# EAGLE board RemoconCar (EAGLE 5.10)
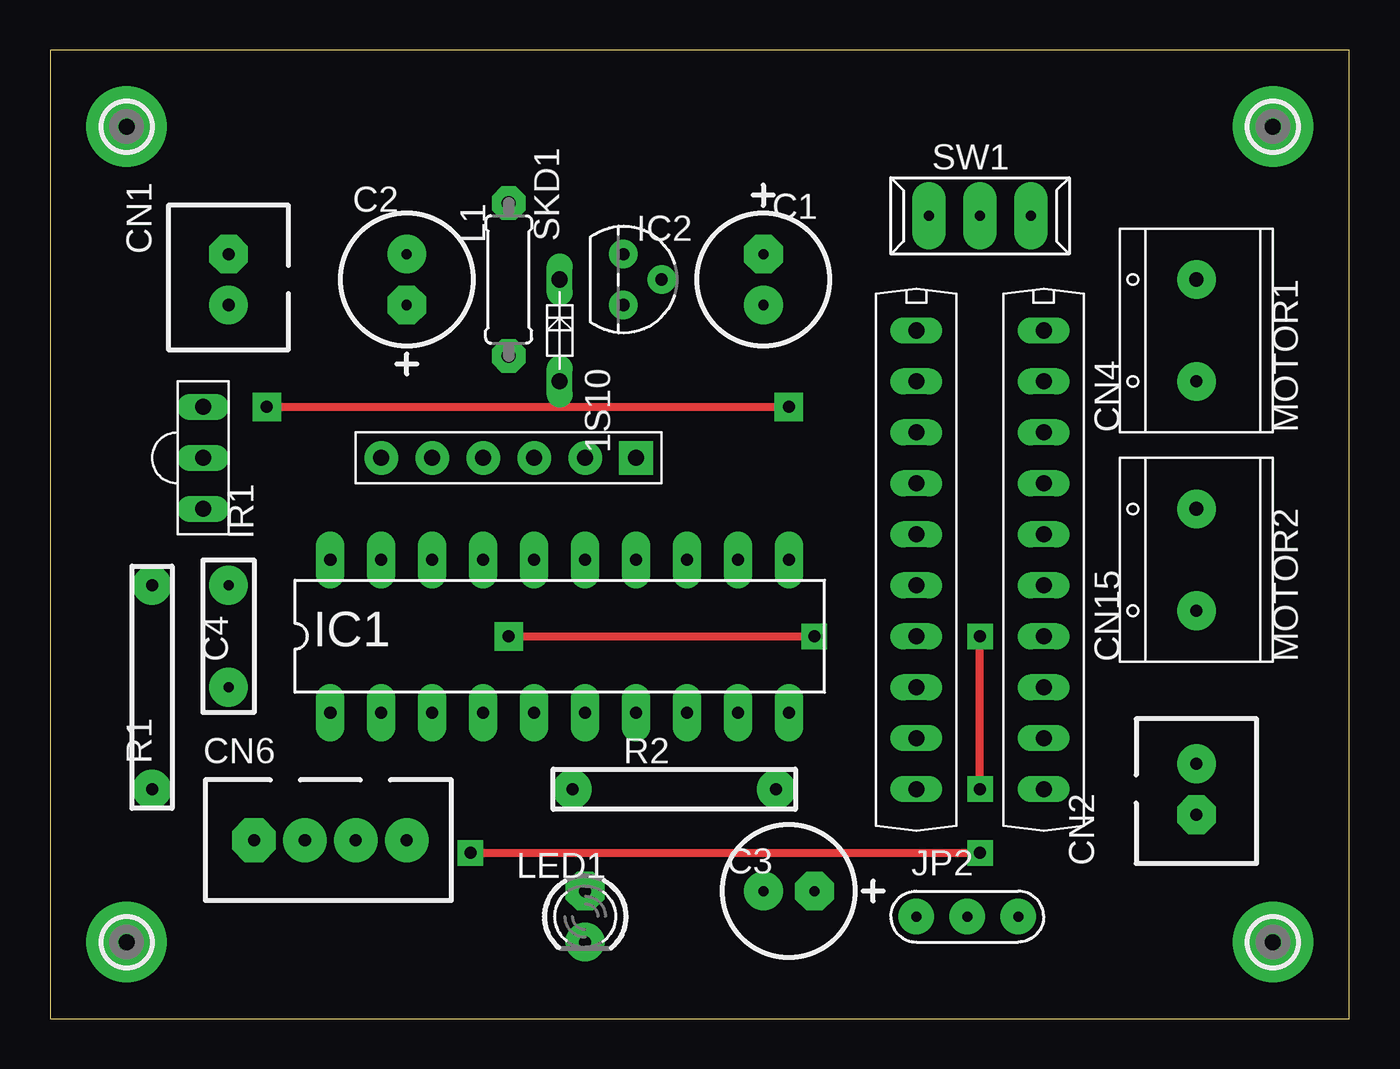
[diagram p0: board, top side]
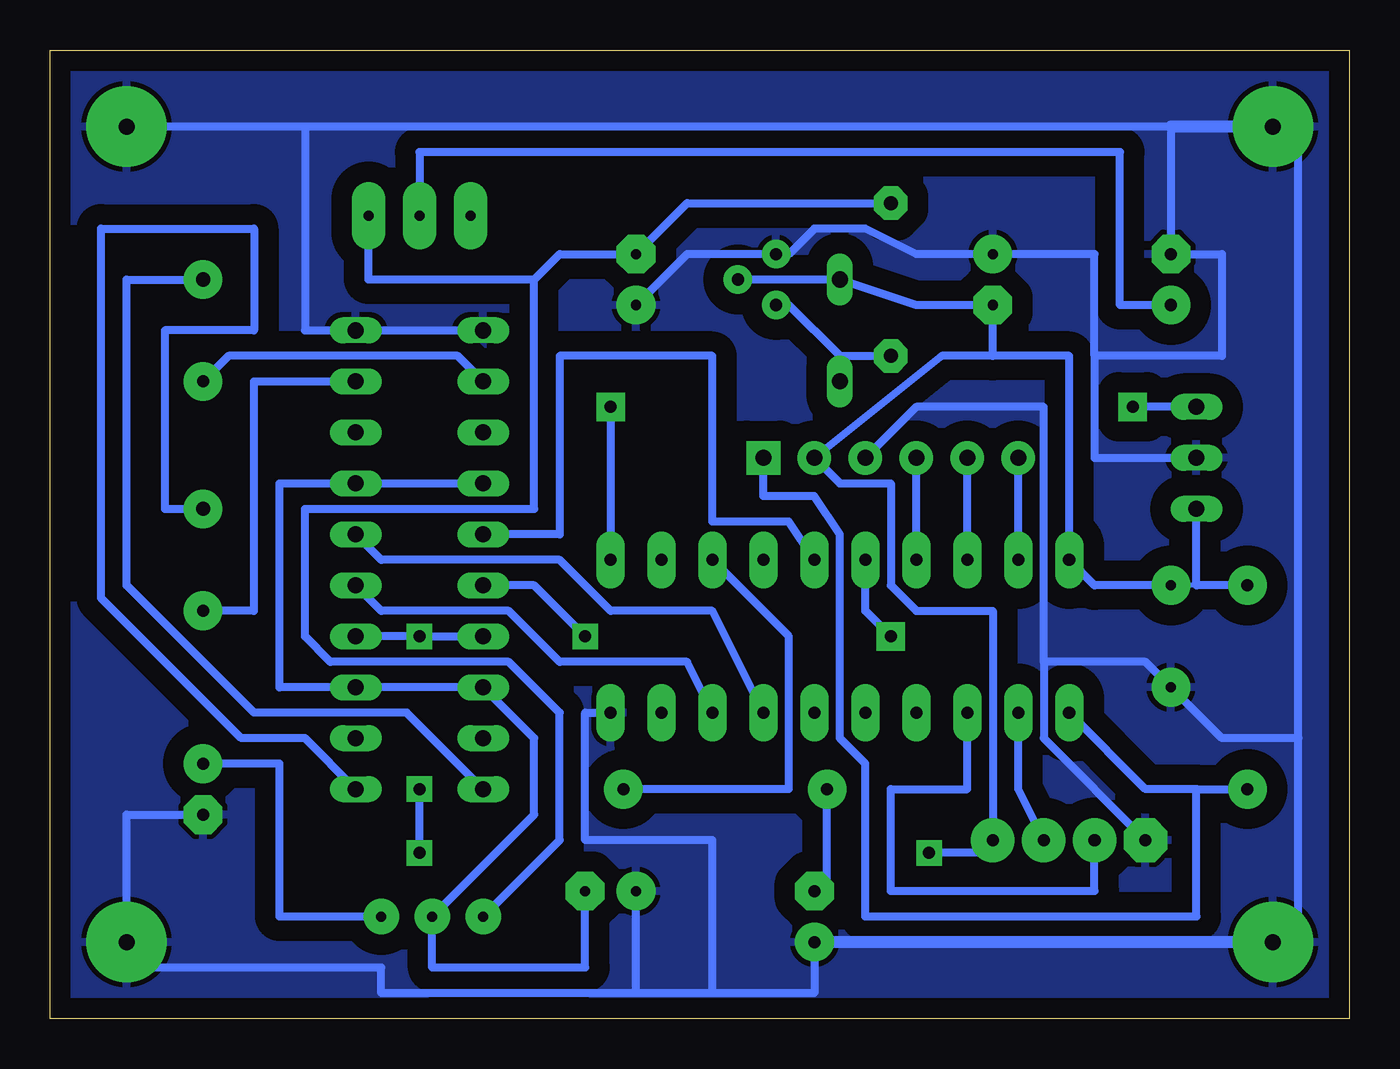
[diagram p1: board, bottom side, seen from below]

Size 64.77 x 48.26 mm. Coordinates in mm from the lower left corner, seen from the top.
Outline: 0,0 64.77,0 64.77,48.26 0,48.26 0,0
Copper layers (1*16): Top 0.035mm / dielectric 1.5mm / Bottom 0.035mm
Design rules "default": minimum track width 10mil, minimum drill 24mil, track to track 8mil, track to pad 8mil, pad to pad 8mil, via to via 8mil, smd to smd 8mil, copper to edge 40mil, drill to drill 8mil, minimum pad ring 10mil, minimum via ring 8mil, stop-mask expansion 4mil, vias tented up to drill 0mil, thermal gap 10mil

## Footprints (pad centres in the part's own frame; a part is rotated, then mirrored left to right if it is on the bottom)
CCAP_6.5 = drill 0.5 pad 1.93 octagon: + -1.27,0 | drill 0.5 pad 1.93 round: - 1.27,0
CAP_DIP_2 = drill 0.5 pad 1.93 round: 1 -2.54,0; 2 2.54,0
CON_HRS_DIP_2 = drill 0.6 pad 1.93 octagon: 1 -1.27,0 | drill 0.6 pad 1.93 round: 2 1.27,0
AVR-ISP-6-FLAT = drill 0.8 pad 1.676 square: 1 -6.35,0 | drill 0.8 pad 1.676 round: 2 -3.81,0; 3 -1.27,0; 4 1.27,0; 5 3.81,0; 6 6.35,0
TERMINAL = drill 0.6 pad 1.93 round: P$1 -2.54,0 | drill 0.7 pad 1.93 round: P$2 2.54,0
CON_HRS_DIP_4 = drill 0.6 pad 2.184 octagon: 1 -3.81,0 | drill 0.6 pad 2.184 round: 2 -1.27,0; 3 1.27,0; 4 3.81,0
DIL20 = drill 0.6 pad 1.422 long: 1 -11.43,-3.81; 2 -8.89,-3.81; 3 -6.35,-3.81; 4 -3.81,-3.81; 5 -1.27,-3.81; 6 1.27,-3.81; 7 3.81,-3.81; 8 6.35,-3.81; 9 8.89,-3.81; 10 11.43,-3.81; 11 11.43,3.81; 12 8.89,3.81; 13 6.35,3.81; 14 3.81,3.81; 15 1.27,3.81; 16 -1.27,3.81; 17 -3.81,3.81; 18 -6.35,3.81; 19 -8.89,3.81; 20 -11.43,3.81
TO92_TRI = drill 0.6 pad 1.422 round: 1 -1.27,0; 2 0,1.905; 3 1.27,0
HSIP10 = drill 0.8 long: 1 -11.43,0; 2 -8.89,0; 3 -6.35,0; 4 -3.81,0; 5 -1.27,0; 6 1.27,0; 7 3.81,0; 8 6.35,0; 9 8.89,0; 10 11.43,0
PL-IRM0208 = drill 0.8 long: 1 -2.54,0; 2 0,0; 3 2.54,0
CSTLS = drill 0.5 pad 1.778 round: 1 -2.54,0; 2 0,0; 3 2.54,0
0207/7 = drill 0.7 pad 1.676 octagon: 1 -3.81,0; 2 3.81,0
LED3MM = drill 0.6 pad 1.93 octagon: A -1.27,0 | drill 0.6 pad 1.93 round: K 1.27,0
PAD-2.1 = drill 0.8 pad 4 round: B2,1 0,0
R_0.125W_4 = drill 0.6 pad 1.93 round: 1 -5.08,0; 2 5.08,0
R-1 = drill 0.8 long: 1-A -2.54,0; 2-K 2.54,0
DS-3 = drill 0.5 pad 1.676 long: 1 0,-2.54; 2 0,0; 3 0,2.54

## Placement (x,y rotation side)
C1  47u  [CCAP_6.5]  35.56,36.83 270 top
C2  22u  [CCAP_6.5]  17.78,36.83 90 top
C3  100u  [CCAP_6.5]  36.83,6.35 180 top
C4  0.1uF  [CAP_DIP_2]  8.89,19.05 90 top
CN1  CPU  [CON_HRS_DIP_2]  8.89,36.83 270 top
CN2  Motor  [CON_HRS_DIP_2]  57.15,11.43 90 top
CN3  AVR-ISP-6  [AVR-ISP-6-FLAT]  22.86,27.94 180 top
CN4  MOTOR1  [TERMINAL]  57.15,34.29 90 top
CN6  TTL_4P  [CON_HRS_DIP_4]  13.97,8.89 0 top
CN15  MOTOR2  [TERMINAL]  57.15,22.86 90 top
IC1  ATTINY2313V  [DIL20]  25.4,19.05 0 top
IC2  HT7750A  [TO92_TRI]  28.57,36.83 270 top
IC3  TA7291P  [HSIP10]  43.18,22.86 270 top
IC4  TA7291P  [HSIP10]  49.53,22.86 270 top
IR1  PL-IRM0101-3  [PL-IRM0208]  7.62,27.94 270 top
JP2  VSS SELECT  [CSTLS]  45.72,5.08 0 top
L1  100u  [0207/7]  22.86,36.83 270 top
LED1  RED  [LED3MM]  26.67,5.08 270 top
MP1  MOUNT-PAD2.1  [PAD-2.1]  60.96,3.81 0 top
MP2  MOUNT-PAD2.1  [PAD-2.1]  60.96,44.45 0 top
MP3  MOUNT-PAD2.1  [PAD-2.1]  3.81,44.45 0 top
MP4  MOUNT-PAD2.1  [PAD-2.1]  3.81,3.81 0 top
R1  10k  [R_0.125W_4]  5.08,16.51 90 top
R2  470  [R_0.125W_4]  31.11,11.43 0 top
SKD1  1S10  [R-1]  25.4,34.29 90 top
SW1  POWER SW  [DS-3]  46.35,40.01 270 top

## Library data of the parts
C1-C4 CN1 CN2 JP2 MP1-MP4 R1 R2 SW1 = MyLib
CN3 CN4 CN6 CN15 = bant
IC1 = atmel
IC2 IR1 SKD1 = keinSoft-01
IC3 IC4 = TA7291P
L1 = rcl
LED1 = led

## Nets
GND: C1.- C2.- C3.- C4.1 CN1.1 CN2.1 CN3.3 CN6.1 IC1.10 IC2.1 IC3.1 IC4.1 IR1.2 LED1.K MP1.B2,1 MP2.B2,1 MP3.B2,1 MP4.B2,1
N$1: IC1.11 IR1.1
N$2: LED1.A R2.1
N$4: IC1.15 IC3.5
N$5: IC1.13 R2.2
N$6: IC2.3 L1.2 SKD1.1-A
N$7: IC1.16 IC3.6
N$8: IC1.7 IC4.5
N$9: IC1.8 IC4.6
N$10: CN15.P$1 IC4.2
N$11: CN15.P$2 IC4.10
N$12: CN4.P$1 IC3.2
N$13: CN4.P$2 IC3.10
N$14: CN3.1 IC1.1 R1.1
N$16: CN6.2 IC1.3
N$17: CN1.2 SW1.2
N$18: CN6.3 IC1.2
N$21: CN3.4 IC1.17
N$22: CN3.5 IC1.18
N$23: CN3.6 IC1.19
N$24: CN2.2 JP2.3
VCC: C2.+ C4.2 CN3.2 CN6.4 IC1.20 IC2.2 IC3.7 IC4.7 IR1.3 R1.2 SKD1.2-K
VPP: C1.+ JP2.1 L1.1 SW1.3
VSS: C3.+ IC3.4 IC3.8 IC4.4 IC4.8 JP2.2

## Tracks (layer width: path | path; a pad name or v marks a point on that pad's centre or on a via)
GND
  Bottom 0.254: MP2.B2,1 59.69,44.45
  Bottom 0.406: IC3.1 IC4.1 52.07,34.29 52.07,44.45 | C1.- 33.02,38.1 IC2.1 27.94,38.1 26.67,39.37 24.13,39.37 21.59,38.1 C2.- 12.7,38.1 12.7,33.02 | 12.7,33.02 12.7,27.94 IR1.2 | 12.7,33.02 6.35,33.02 6.35,38.1 CN1.1 8.89,44.45 52.07,44.45 | CN3.3 21.59,30.48 15.24,30.48 15.24,17.78 | 15.24,17.78 10.16,17.78 C4.1 6.35,13.97 2.54,13.97 | CN6.1 15.24,13.97 15.24,17.78 | IC1.10 38.1,15.24 38.1,8.89 31.75,8.89 31.75,1.27 | 2.54,3.81 2.54,13.97 | 2.54,13.97 2.54,44.45 | CN2.1 60.96,10.16 MP1.B2,1 59.69,2.54 48.26,2.54 48.26,1.27 35.56,1.27 | LED1.K 26.67,1.27 31.75,1.27 | 31.75,1.27 35.56,1.27 | 35.56,1.27 C3.- | 52.07,44.45 MP2.B2,1
  Bottom 0.61: 8.89,44.45 MP3.B2,1 2.54,44.45 | LED1.K MP4.B2,1 2.54,3.81
  pour Bottom (isolate 1.016): 0,48.26 0,0 64.77,0 64.77,48.26
N$1  (via drill 0.6 pad 1.42)
  Top 0.406: v10.79,30.48 v36.83,30.48
  Bottom 0.406: IR1.1 v10.79,30.48 | v36.83,30.48 IC1.11
N$2
  Bottom 0.406: R2.1 26.04,6.35 LED1.A
N$4
  Bottom 0.406: IC3.5 39.37,24.13 39.37,33.02 31.75,33.02 31.75,24.77 27.94,24.77 IC1.15
N$5
  Bottom 0.406: IC1.13 27.94,19.05 27.94,11.43 R2.2
N$6
  Bottom 0.254: 27.94,35.56 IC2.3
  Bottom 0.406: 25.4,33.02 27.94,35.56 | 25.4,33.02 L1.2 | SKD1.1-A 25.4,33.02
N$7  (via drill 0.6 pad 1.27, 0.6 pad 1.42)
  Top 0.406: v22.86,19.05 v38.1,19.05
  Bottom 0.406: IC3.6 40.64,21.59 v38.1,19.05 | v22.86,19.05 24.13,20.32 IC1.16
N$8
  Bottom 0.406: IC4.5 48.26,22.86 39.37,22.86 36.83,20.32 31.75,20.32 IC1.7
N$9
  Bottom 0.406: IC4.6 48.26,20.32 41.91,20.32 39.37,17.78 33.02,17.78 IC1.8
N$10
  Bottom 0.406: IC4.2 54.61,31.75 54.61,20.32 CN15.P$1
N$11
  Bottom 0.406: IC4.10 52.07,13.97 55.24,13.97 62.23,20.95 62.23,39.37 54.61,39.37 54.61,34.29 59.05,34.29 59.05,25.4 CN15.P$2
N$12
  Bottom 0.406: IC3.2 44.45,33.02 55.88,33.02 CN4.P$1
N$13
  Bottom 0.406: IC3.10 46.99,15.24 54.61,15.24 60.96,21.59 60.96,36.83 CN4.P$2
N$14
  Bottom 0.406: IC1.1 10.16,11.43 7.62,11.43 | 7.62,11.43 R1.1 | CN3.1 29.21,26.04 26.67,26.04 25.4,24.13 25.4,13.97 24.13,12.7 24.13,5.08 7.62,5.08 7.62,11.43
N$16
  Bottom 0.406: IC1.3 19.05,11.43 22.86,11.43 22.86,6.35 12.7,6.35 CN6.2
N$17
  Bottom 0.406: CN1.2 11.43,35.56 11.43,43.18 16.51,43.18 46.35,43.18 SW1.2
N$18
  Bottom 0.406: IC1.2 16.51,11.43 CN6.3
N$21
  Bottom 0.406: IC1.17 CN3.4
N$22
  Bottom 0.406: IC1.18 CN3.5
N$23
  Bottom 0.406: IC1.19 CN3.6
N$24
  Bottom 0.406: JP2.3 53.34,5.08 53.34,12.7 CN2.2
VCC  (via drill 0.6 pad 1.27)
  Top 0.406: v46.35,11.43 v46.35,19.05 | v20.95,8.26 v46.35,8.26
  Bottom 0.254: 7.62,21.59 C4.2
  Bottom 0.406: IR1.3 7.62,21.59 R1.2 | C4.2 12.7,21.59 IC1.20 13.97,33.02 17.78,33.02 | IC2.2 SKD1.2-K 21.59,35.56 C2.+ 17.78,33.02 | 17.78,33.02 20.32,33.02 CN3.2 25.4,26.67 22.86,26.67 22.86,21.59 21.59,20.32 17.78,20.32 CN6.4 18.41,8.89 18.41,8.26 v20.95,8.26 | IC4.7 v46.35,19.05 IC3.7 | v46.35,8.26 v46.35,11.43
VPP
  Bottom 0.406: L1.1 33.02,40.64 C1.+ 39.37,38.1 40.64,36.83 | 40.64,36.83 48.9,36.83 SW1.3 | JP2.1 39.37,8.89 39.37,15.24 41.91,17.78 50.8,17.78 52.07,19.05 52.07,25.4 40.64,25.4 40.64,36.83
VSS
  Bottom 0.406: IC3.4 IC4.4 53.34,26.67 53.34,16.51 IC4.8 IC3.8 40.64,13.97 40.64,10.16 JP2.2 45.72,2.54 38.1,2.54 C3.+